# Altium PCB upduino_tinymatrix.PcbDoc
Units mil, origin at the board's own origin, x right, y up, seen from the top; angles counter-clockwise.
Board outline 1900 x 2000 mil, 2 copper layers (Top Layer, Bottom Layer), stack 46.186 mil thick; 10 components, 35 nets, 78 pads, 6 vias.
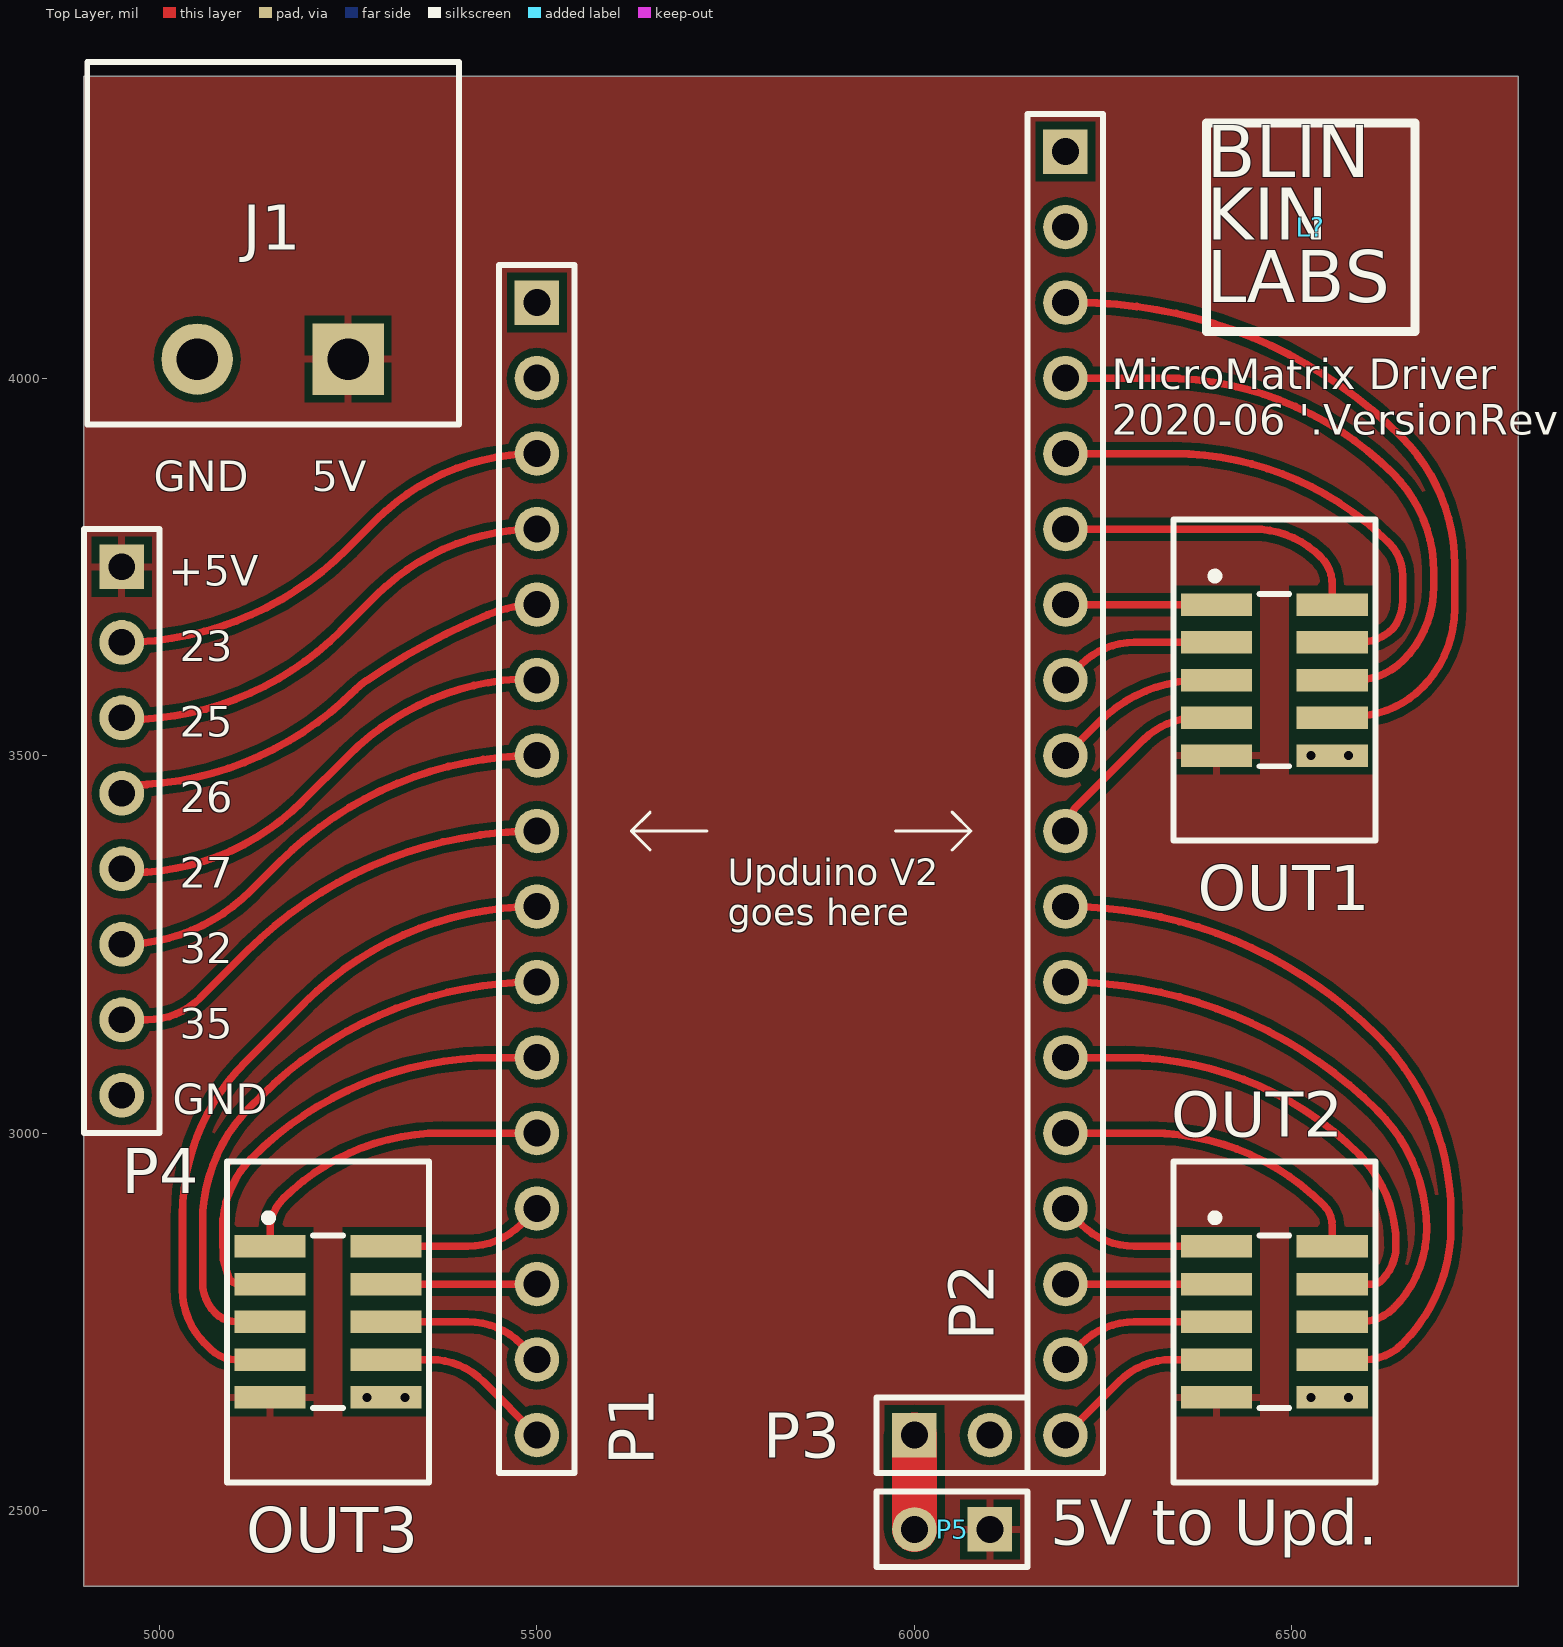
[diagram p0: Top Layer view]
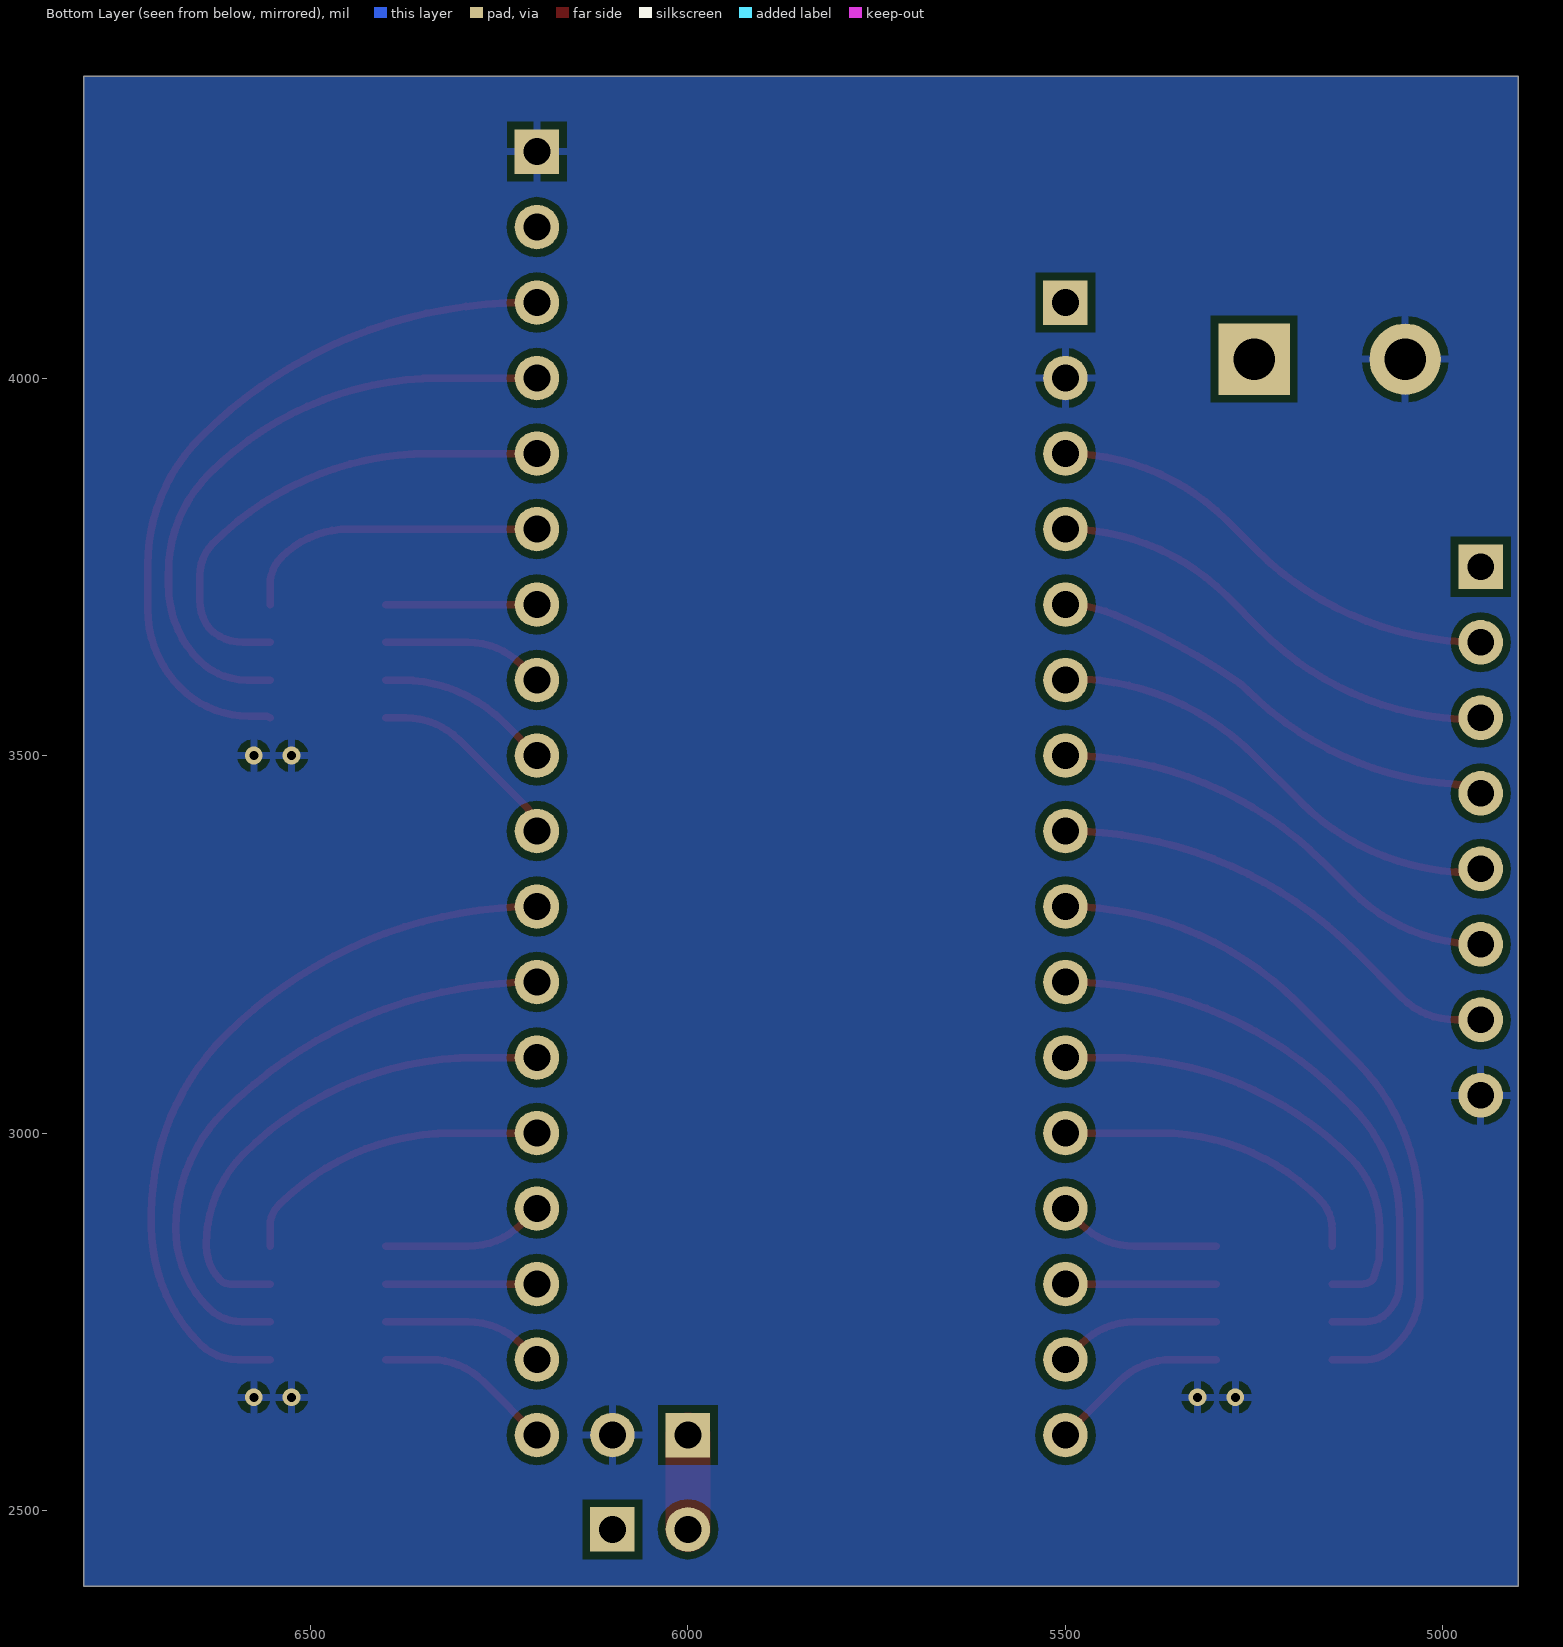
[diagram p1: Bottom Layer view, seen from below]

## Layer stack, top to bottom
Top Solder: solder mask 0.5, Solder Resist, Dk 3.8
Top Layer: signal copper 1.4
Dielectric 1: dielectric 43.3858, FR-4, Dk 4.8
Bottom Layer: signal copper 1.4
Bottom Solder: solder mask 0.5, Solder Resist, Dk 3.8

## Board outline
4900,2400 4900,4400 6800,4400 6800,2400

## Design rules (kind name [scope] priority, off if disabled: settings)
Clearance [All] p1: gap=10 ignorepadtopadclearanceinfootprint=FALSE except(0: Arc-Hole Track-Hole SMDPad-Hole THPad-Hole Via-Hole Fill-Hole Poly-Hole Region-Hole Text-Hole)
PolygonConnect [All] p1: connectstyle=Relief reliefconductorwidth=10 reliefentries=4 polygonreliefangle="90 Angle" airgapwidth=10
RoomDefinition upduino_tinymatrix [InComponentClass('upduino_tinymatrix')] p1: confinementstyle=ConfineIn formatcopy=TRUE lockcomponents=FALSE outline 4675,2325 6975,2325 6975,4800 4675,4800
RoutingVias [All] p1: holewidth=28 width=50 viastyle="Through Hole" minholewidth=28 minwidth=50 maxholewidth=28 maxwidth=50
SolderMaskExpansion [All] p1: expansion=4 istentingtop=FALSE
Width [All] p1: maxlimit=60 minlimit=10 preferedwidth=10
30 further rules are at their usual default settings.

## Components (designator, comment, footprint, x,y, rotation, side; value= is the part's Value field where it differs from the comment)
J1 "1757242" 1757242 5150,4025 r90 top
L? "BLINKINLABS_LOGO" BLINKINLABS_LOGO 6525,4200 r0 top
OUT1 "ARM Cortex JTAG" "1.27mm 2x5 SMD Header" 6476.77,3600 r270 top
OUT2 "ARM Cortex JTAG" "1.27mm 2x5 SMD Header" 6476.77,2750 r270 top
OUT3 "ARM Cortex JTAG" "1.27mm 2x5 SMD Header" 5223.23,2750 r270 top
P1 "Header 16" HDR1X16 5500,4100 r270 top
P2 "Header 18" HDR1X18 6200,4300 r270 top
P3 "Header 2" HDR1X2 6000,2600 r0 top
P4 "Header 8" HDR1X8 4950,3750 r270 top
P5 "5V to Upd." HDR1X2 6100,2475 r180 top

## Footprints (in the part's own frame and the unit in brackets; to place one, negate y for a bottom-side part, rotate by r counter-clockwise, add the part's x,y. Pads: shape width x height; smd on the part's side, far side on the other; paste and mask are expansions set on the pad)
"1.27mm 2x5 SMD Header" [mm]
  rect 0.76x2.4 smd: 1(-2.54,-1.95) 2(-2.54,1.95) 3(-1.27,-1.95) 4(-1.27,1.95) 5(0,-1.95) 6(0,1.95) 7(1.27,-1.95) 8(1.27,1.95) 9(2.54,-1.95) 10(2.54,1.95)
  silkscreen extent -5.4,-3.4 5.4,3.4, body extent -3.15,-2.75 3.2,2.75, height 4.5
1757242 [mm] "TERM BLOCK HDR 2POS 90DEG 5.08MM"
  rect 2.4x2.4 hole 1.4: 1(0,-2.54)
  round 2.4 hole 1.4: 2(0,2.54)
  silkscreen extent -2.2,-6.27 10,6.24, body extent -2,-6.07 10,6.09, height 8.6
BLINKINLABS_LOGO [mil] "Square blinkinlabs logo"
  silkscreen extent -138,-138 138,138
HDR1X2 [mm] "Connector; Header; 2 Position"
  rect 1.5x1.5 hole 0.9: 1(0,0)
  round 1.5 hole 0.9: 2(2.54,0)
  silkscreen extent -1.27,-1.27 3.81,1.27
HDR1X8 [mm] "Connector; Header; 8 Position"
  rect 1.5x1.5 hole 0.9: 1(0,0)
  round 1.5 hole 0.9: 2(2.54,0) 3(5.08,0) 4(7.62,0) 5(10.16,0) 6(12.7,0) 7(15.24,0) 8(17.78,0)
  silkscreen extent -1.27,-1.27 19.05,1.27
HDR1X16 [mm] "Connector; Header; 16 Position"
  rect 1.5x1.5 hole 0.9: 1(0,0)
  round 1.5 hole 0.9: 2(2.54,0) 3(5.08,0) 4(7.62,0) 5(10.16,0) 6(12.7,0) 7(15.24,0) 8(17.78,0) 9(20.32,0) 10(22.86,0) 11(25.4,0) 12(27.94,0) 13(30.48,0) 14(33.02,0) 15(35.56,0) 16(38.1,0)
  silkscreen extent -1.27,-1.27 39.37,1.27
HDR1X18 [mm] "Connector; Header; 18 Position"
  rect 1.5x1.5 hole 0.9: 1(0,0)
  round 1.5 hole 0.9: 2(2.54,0) 3(5.08,0) 4(7.62,0) 5(10.16,0) 6(12.7,0) 7(15.24,0) 8(17.78,0) 9(20.32,0) 10(22.86,0) 11(25.4,0) 12(27.94,0) 13(30.48,0) 14(33.02,0) 15(35.56,0) 16(38.1,0) 17(40.64,0) 18(43.18,0)
  silkscreen extent -1.27,-1.27 44.45,1.27

## Part data
J1: "TERM BLOCK HDR 2POS 90DEG 5.08MM", Manufacturer="Phoenix Contact", PartNumber=1757268, ComponentLink2Description=Datasheet, ComponentLink2URL=1757268_06_en_00.pdf
L?: "Square logo"
OUT1 OUT2 OUT3: "Arm Cortex 10-pin JTAG connector"
P1: "Header, 16-Pin", LatestRevisionDate=17-Jul-2002, LatestRevisionNote="Re-released for DXP Platform.", Publisher="Altium Limited"
P2: "Header, 18-Pin", LatestRevisionDate=17-Jul-2002, LatestRevisionNote="Re-released for DXP Platform.", Publisher="Altium Limited"
P3: "Header, 2-Pin", LatestRevisionDate=17-Jul-2002, LatestRevisionNote="Re-released for DXP Platform.", Publisher="Altium Limited"
P4: "Header, 8-Pin", LatestRevisionDate=17-Jul-2002, LatestRevisionNote="Re-released for DXP Platform.", Publisher="Altium Limited"
P5: library part "Header 2", LatestRevisionDate=17-Jul-2002, LatestRevisionNote="Re-released for DXP Platform.", Publisher="Altium Limited"

## Via types
v1: diameter 23.62, hole 11.81, Top Layer to Bottom Layer, 6 vias

## Nets (pads, with @x,y where several pads share a name; then routed paths per layer and width w, separated by ;. In a path a pad name is that pad's centre, name@x,y a point inside that pad or via, vN(x,y) a via of type N, cw(c..) or ccw(c..) an arc to the next point about the centre after c; other vN are vias at no path point)
+3.3V: P1.1
+5V: J1.1 OUT1.9 OUT2.9 OUT3.9 P4.1 P5.1
GND: J1.2 OUT1.10 OUT2.10 OUT3.10 P1.2 P2.1 P3.2 P4.8
  other v1: 5275,2650 5325,2650 6525,2650 6575,2650 6525,3500 6575,3500
IO_2: OUT2.7 P2.18 | length 237.1
  Top Layer w10: P2.18 6270.71,2670.71 cw(c6341.42,2600) 6341.42,2700 OUT2.7
IO_3: OUT2.4 P2.13 | length 674.8
  Top Layer w10: P2.13 6279.43,3100 6279.5,3100 cw(c6279.5,2662.54) 6588.78,2971.92 cw(c6469.62,2853.25) 6637.8,2853.27 6637.8,2853.17 6637.8,2850.27 cw(c6573.95,2850.27) 6619.09,2805.12 cw(c6606.74,2817.47) 6606.74,2800 OUT2.4
IO_4: OUT2.6 P2.12 | length 835.4
  Top Layer w10: P2.12 cw(c6200,2613.55) 6613.28,3029.63 6613.32,3029.58 cw(c6458.09,2873.12) 6678.49,2873.25 cw(c6530.12,2873.32) 6634.99,2768.36 cw(c6590.61,2812.82) 6590.61,2750 OUT2.6
IO_6: OUT1.7 P2.10 | length 266.3
  Top Layer w10: P2.10 cw(c6242.3,3400) 6212.38,3429.9 6303.19,3520.71 cw(c6373.9,3450) 6373.9,3550 OUT1.7
IO_9: OUT1.5 P2.9 | length 233.1
  Top Layer w10: P2.9 6243.59,3543.59 cw(c6379.73,3407.52) 6379.73,3600 OUT1.5
IO_11: OUT1.3 P2.8 | length 216.4
  Top Layer w10: P2.8 6220.71,3620.71 cw(c6291.42,3550) 6291.42,3650 OUT1.3
IO_12: OUT1.8 P2.3 | length 984.6
  Top Layer w10: P2.3 6214.9,4100 6214.96,4100 cw(c6214.96,3491.19) 6645.48,3921.65 cw(c6476.17,3752.43) 6715.55,3752.46 6715.55,3752.36 6715.55,3694.31 cw(c6567.49,3694.31) 6672.23,3589.66 cw(c6581.69,3680.22) 6581.69,3552.17 6559.8,3552.17 ccw(c6559.76,3542.17) OUT1.8
IO_13: OUT1.4 P2.5 | length 666.4
  Top Layer w10: P2.5 6342.02,3900 6342.08,3900 cw(c6342.08,3494.49) 6628.81,3781.24 6628.89,3781.16 cw(c6585.77,3738.18) 6646.65,3738.18 6646.65,3705.71 cw(c6584.87,3705.71) 6634.21,3668.53 cw(c6589.49,3713.25) 6589.49,3650 OUT1.4
IO_18: OUT1.1 P2.7 | length 200
  Top Layer w10: P2.7 OUT1.1
IO_19: OUT1.2 P2.6 | length 415.2
  Top Layer w10: P2.6 6448.88,3800 6448.94,3800 cw(c6448.94,3673.74) 6538.27,3762.97 cw(c6501.24,3726.03) 6553.54,3726.03 OUT1.2
IO_21: OUT1.6 P2.4 | length 841.2
  Top Layer w10: P2.4 6327.87,4000 6327.93,4000 cw(c6327.93,3567.1) 6634.09,3873.16 cw(c6503.73,3742.93) 6687.99,3742.96 6687.99,3742.87 6687.99,3723.84 6687.99,3723.77 cw(c6550.11,3723.77) 6647.61,3626.28 6647.57,3626.24 cw(c6584.17,3689.71) 6584.17,3600 OUT1.6
IO_23: P1.3 P4.2 | length 622.4
  Top Layer w10: P4.2 ccw(c4950,4072.49) 5248.78,3773.78 5286.57,3811.57 cw(c5500,3598.22) P1.3
IO_25: P1.4 P4.3 | length 624.7
  Top Layer w10: P4.3 4954.12,3548.29 4954.18,3548.27 ccw(c4957.95,3557.53) 4957.94,3547.53 ccw(c4955.97,3949.63) 5240.38,3665.38 5286.57,3711.57 cw(c5500,3498.22) P1.4
IO_26: P1.5 P4.4 | length 618.1
  Top Layer w10: P4.4 4951.91,3454.61 cw(c4961.15,3450.78) 4961,3460.78 ccw(c4954.45,3891.61) 5259,3586.81 5259.04,3586.85 cw(c5335.11,3510.79) 5275,3600 cw(c5799.94,2820.98) 5434.02,3686.16 cw(c5502.39,3524.42) 5499.78,3700 P1.5
IO_27: P1.6 P4.5 | length 629
  Top Layer w10: P4.5 4960.13,3345.81 ccw(c4963.95,3355.04) 4963.96,3345.04 ccw(c4961.98,3666.27) 5189.19,3439.19 5250,3500 cw(c5496.47,3253.64) 5492.87,3602.1 cw(c5492.93,3592.1) 5496.76,3601.34 P1.6
IO_28: OUT3.8 P1.16 | length 237.1
  Top Layer w10: OUT3.8 5358.58,2700 cw(c5358.58,2600) 5429.29,2670.71 P1.16
IO_31: OUT3.7 P1.9 | length 948.8
  Top Layer w10: OUT3.7 5100.7,2700 cw(c5100.7,2746.37) 5067.91,2713.58 5059.8,2721.7 cw(c5130.51,2792.41) 5030.51,2792.41 5030.51,2891.71 5030.51,2891.77 cw(c5317.93,2891.77) 5114.73,3095.05 5192.15,3172.46 cw(c5500,2864.68) P1.9
IO_32: P1.7 P4.6 | length 622.4
  Top Layer w10: P4.6 ccw(c4950,3491.42) 5120.75,3320.75 5158.41,3358.41 cw(c5500.08,3016.98) P1.7
IO_34: OUT3.3 P1.11 | length 641.4
  Top Layer w10: OUT3.3 5107.38,2800 cw(c5107.38,2821.19) 5092.4,2806.21 5084.88,2830.62 cw(c5099.21,2835.04) 5084.22,2834.7 5083.66,2859.25 5083.66,2874.18 5083.66,2874.24 cw(c5214.56,2874.24) 5122.04,2966.84 cw(c5443.52,2645.36) 5443.48,3100 5443.58,3100 P1.11
IO_35: P1.8 P4.7 | length 625.9
  Top Layer w10: P4.7 4983.58,3150 ccw(c4983.58,3250) 5054.29,3179.29 5115.79,3240.79 cw(c5500.04,2856.7) P1.8
IO_36: OUT3.2 P1.13 | length 216.4
  Top Layer w10: OUT3.2 5408.58,2850 ccw(c5408.58,2950) 5479.29,2879.29 P1.13
IO_37: OUT3.5 P1.10 | length 795.9
  Top Layer w10: OUT3.5@5102.33,2750 cw(c5102.33,2790.32) 5073.82,2761.81 cw(c5114.21,2802.21) 5057.09,2802.21 5057.09,2802.27 5057.09,2881.91 5057.09,2881.98 cw(c5273.11,2881.98) 5120.4,3034.77 5134.01,3048.38 cw(c5500,2682.47) P1.10 ; OUT3.5@5102.38,2750 OUT3.5
IO_38: OUT3.6 P1.15 | length 216.4
  Top Layer w10: OUT3.6 5408.58,2750 cw(c5408.58,2650) 5479.29,2720.71 P1.15
IO_42: OUT3.4 P1.14 | length 200
  Top Layer w10: OUT3.4 P1.14
IO_43: OUT3.1 P1.12 | length 427
  Top Layer w10: OUT3.1 5146.46,2871.46 cw(c5204.7,2871.46) 5163.47,2912.6 cw(c5374.41,2701.76) 5374.37,3000 5374.47,3000 P1.12
IO_44: OUT2.8 P2.11 | length 1008.5
  Top Layer w10: P2.11 cw(c6200,2716) 6612.85,3129.04 cw(c6376.74,2892.97) 6710.63,2893.04 6710.63,2892.95 6710.63,2876.11 cw(c6490.65,2876.11) 6646.16,2720.51 cw(c6596.57,2770.18) 6596.57,2700 OUT2.8
IO_45: OUT2.1 P2.15 | length 216.4
  Top Layer w10: P2.15 6220.71,2879.29 ccw(c6291.42,2950) 6291.42,2850 OUT2.1
IO_46: OUT2.5 P2.17 | length 216.4
  Top Layer w10: P2.17 6220.71,2720.71 cw(c6291.42,2650) 6291.42,2750 OUT2.5
IO_47: OUT2.3 P2.16 | length 200
  Top Layer w10: P2.16 OUT2.3
IO_48: OUT2.2 P2.14 | length 425.1
  Top Layer w10: P2.14 6311.82,3000 6311.88,3000 cw(c6311.88,2674.91) 6541.78,2904.75 cw(c6513.28,2876.31) 6553.54,2876.31 OUT2.2
J8_OSC_OUT: P2.2
NetP3_1: P3.1 P5.2 | length 125
  Top Layer w60: P5.2 P3.1

## Polygon pours and split planes (outlines as drawn)
no net on Top Layer "NONET_L01_P001" (solid, pour order 1): 5200,3500
+5V on Top Layer "+5V_L01_P000" (solid, pour order 0): 4900,4400 6800,4400 6800,2400 4900,2400
GND on Bottom Layer "GND_L02_P002" (solid, pour order 2): 4900,4400 6800,4400 6800,2400 4900,2400

## Silkscreen, mask and mechanical layers (free items; w line width, h text height)
Top Overlay:
  lines w3.94: 5650,3375 5625,3400 ; 5650,3425 5625,3400 ; 5725,3400 5625,3400 ; 5975,3400 6075,3400 ; 6050,3375 6075,3400 ; 6050,3425 6075,3400
  text "MicroMatrix Driver / 2020-06 '.VersionRevision'" at 6261.56,3925 h40
  text "GND" at 4992.66,3850 h40
  text "5V" at 5201.89,3850 h40
  text "+5V" at 5012.62,3725 h40
  text "23" at 5026.89,3625 h40
  text "25" at 5026.89,3525 h40
  text "26" at 5026.89,3425 h40
  text "27" at 5026.89,3325 h40
  text "Upduino V2 / goes here" at 5752.94,3275 h35.43
  text "32" at 5026.89,3225 h40
  text "35" at 5026.89,3125 h40
  text "GND" at 5017.66,3025 h40
Mechanical 1:
  the board outline again, w3.94

## Dimensions
4900,4400 to 4900,2400 on Dimensions
4900,2400 to 6800,2400 on Dimensions

## Text inside footprints (layer, text, board x,y; h text height)
L?: Top Overlay "BLIN" at 6387.2,4243.31 h118.11; Top Overlay "KIN" at 6387.2,4160.63 h118.11; Top Overlay "LABS" at 6387.2,4077.95 h118.11